# Altium PCB PCB1.PcbDoc
Units mm, origin at the board's own origin, x right, y up, seen from the top; angles counter-clockwise.
Board outline 140.46 x 110.24 mm, 2 copper layers (Top Layer, Bottom Layer); 74 components, 50 nets, 244 pads, 30 vias.
Unrouted connection lines stored in the file: 1.
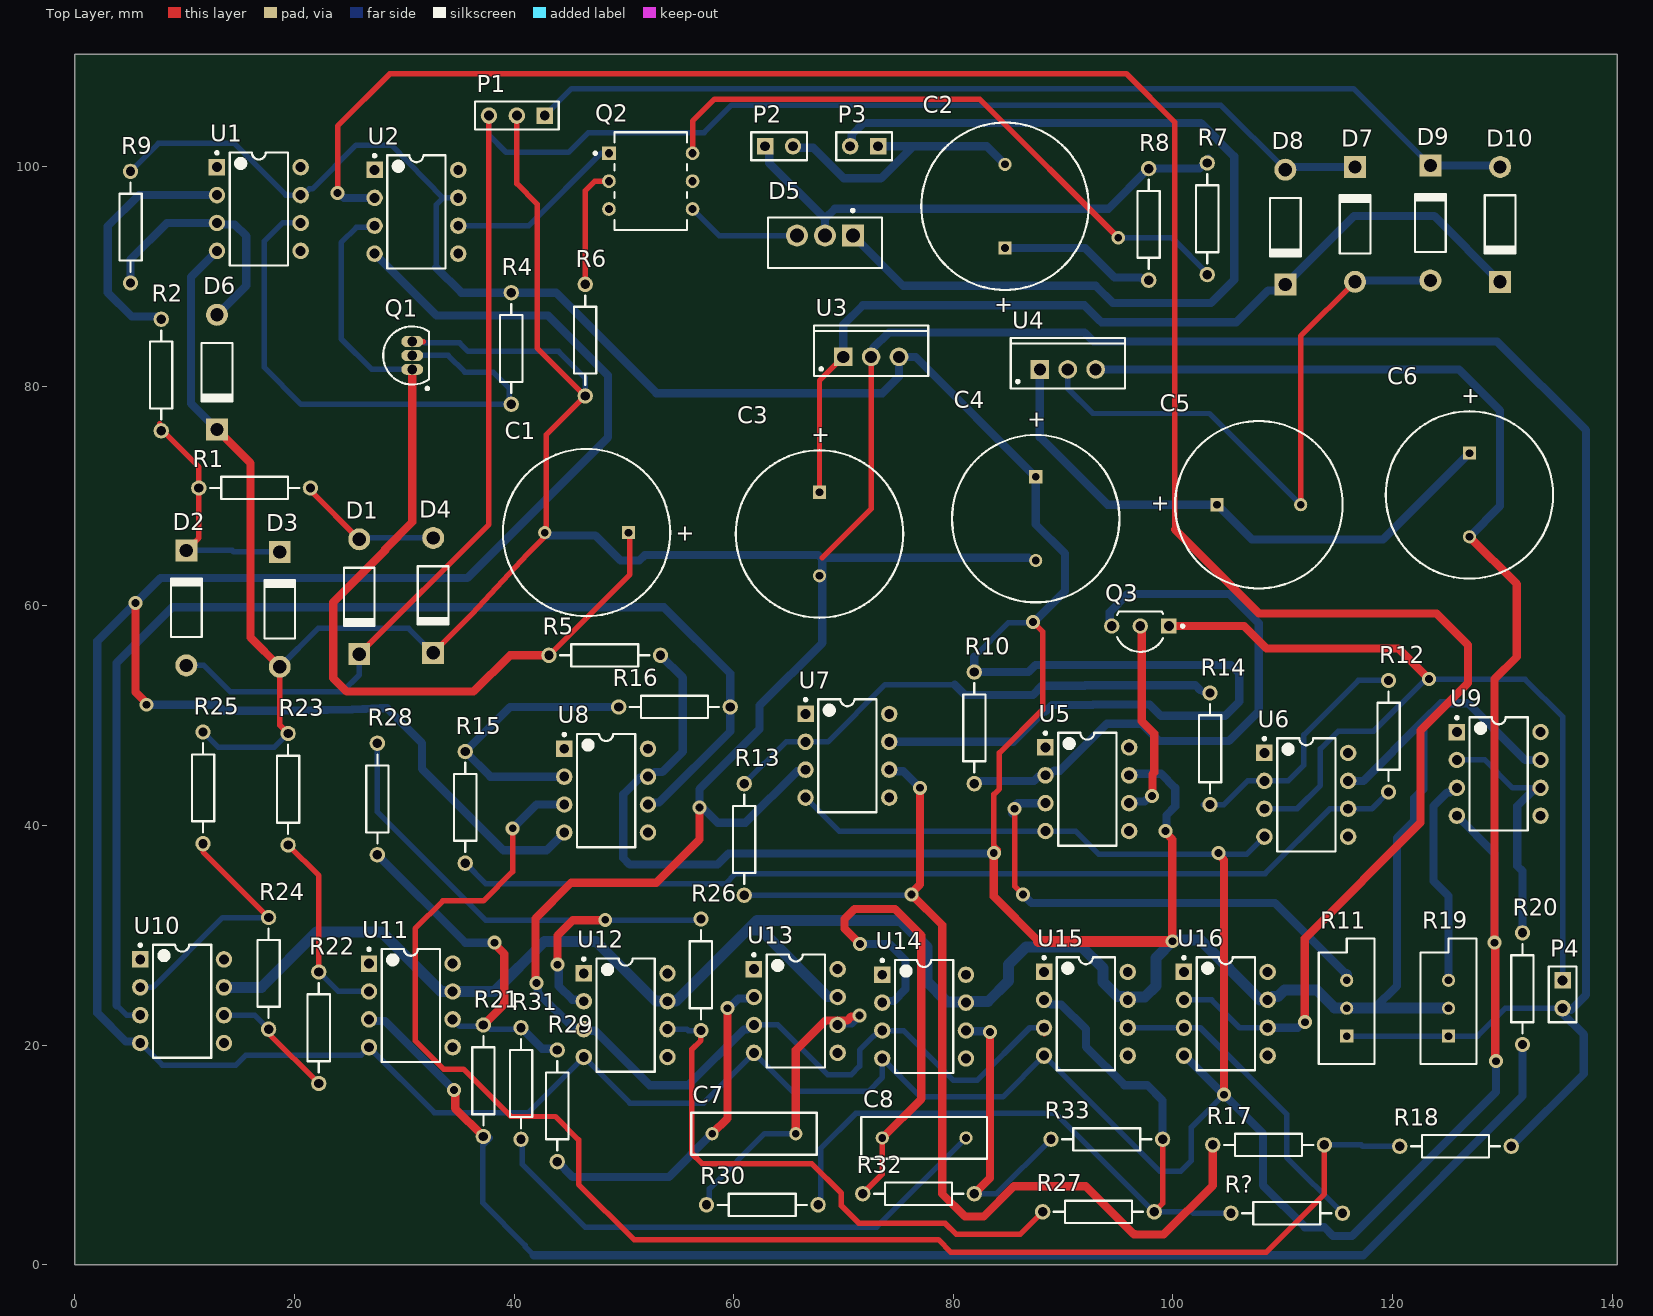
[diagram p0: Top Layer view]
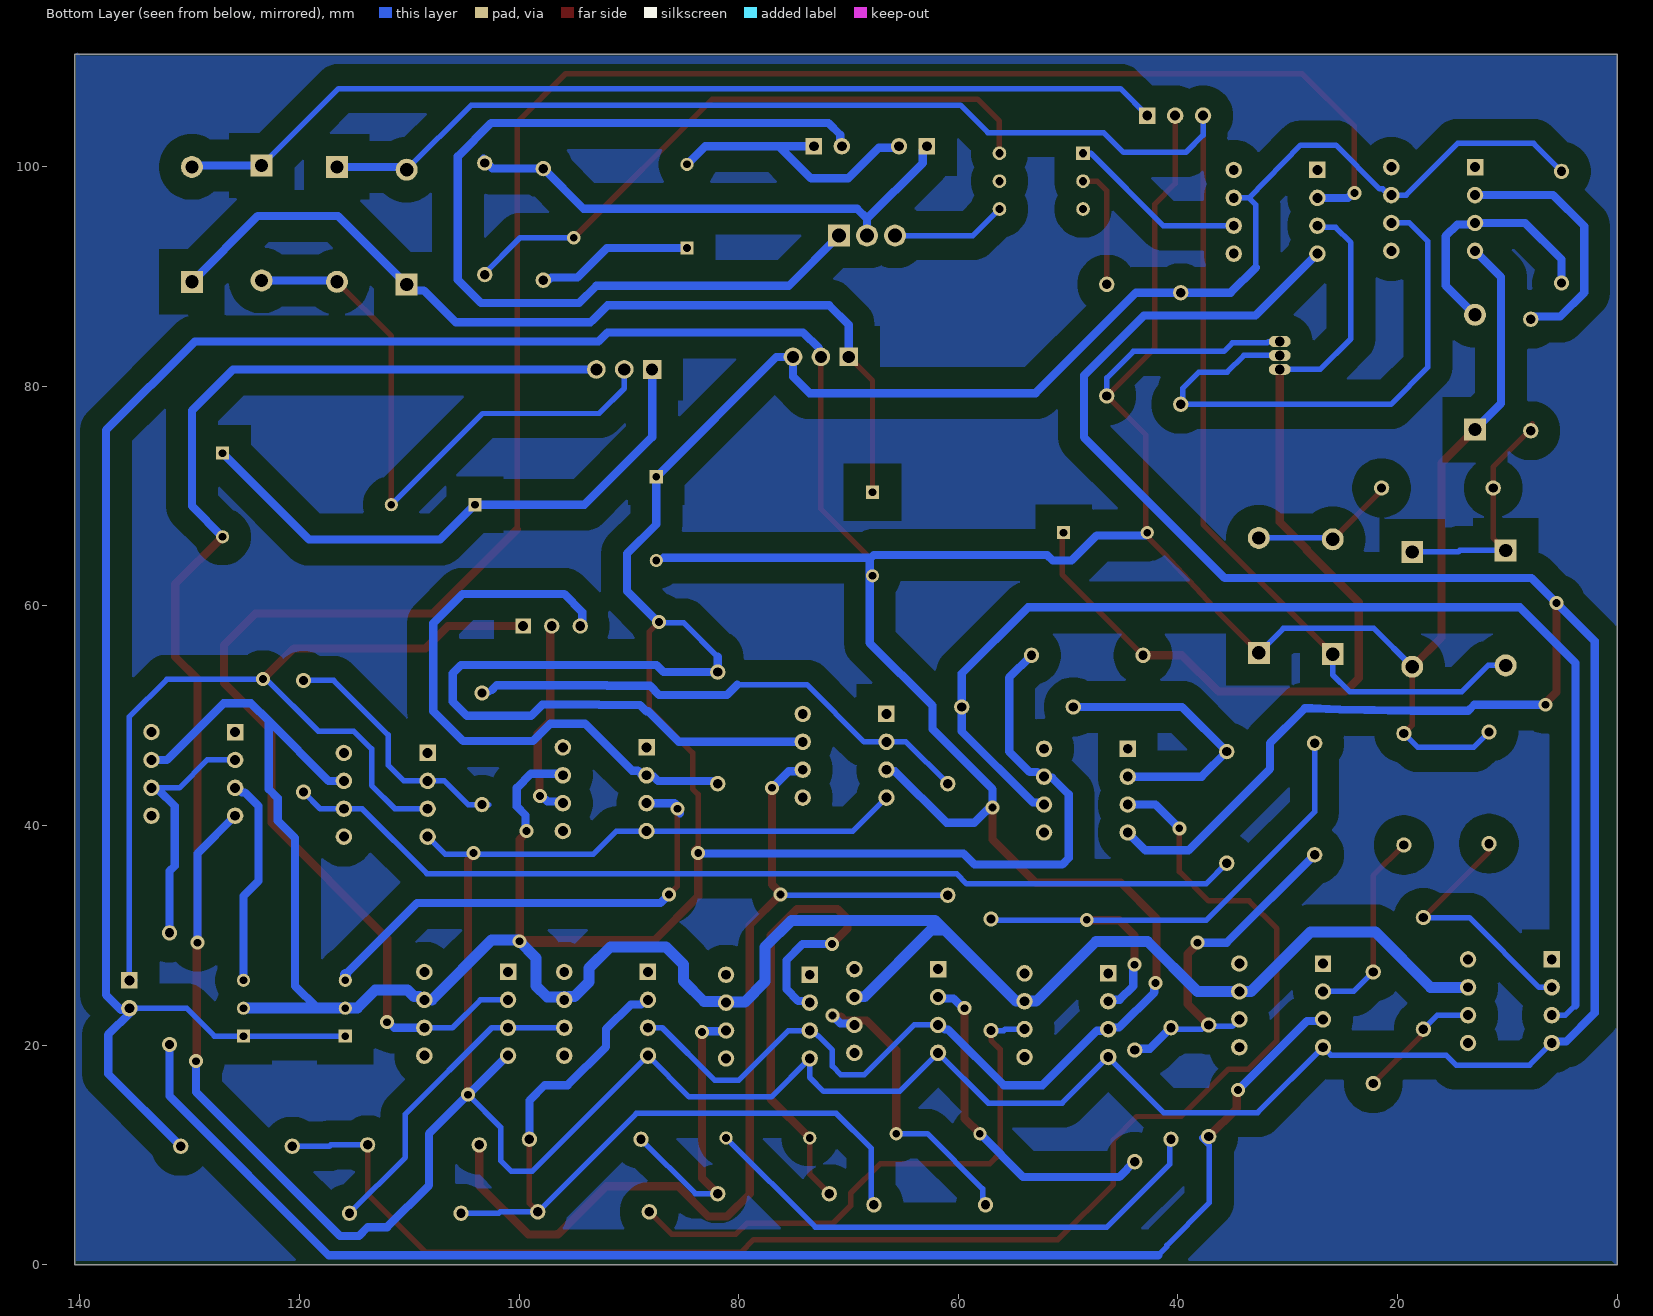
[diagram p1: Bottom Layer view, seen from below]

## Layer stack, top to bottom
Top Solder: solder mask 0.0102, Solder Resist, Dk 3.5
Top Layer: signal copper 0.0356
Dielectric 1: dielectric 0.32, FR-4, Dk 4.8
Bottom Layer: signal copper 0.0356
Bottom Solder: solder mask 0.0102, Solder Resist, Dk 3.5

## Board outline
0,0 140.462,0 140.462,110.236 0,110.236

## Design rules (kind name [scope] priority, off if disabled: settings)
Clearance [All] p1: gap=1 ignorepadtopadclearanceinfootprint=FALSE
PolygonConnect [All] p1: connectstyle=Relief reliefconductorwidth=0.254 reliefentries=4 polygonreliefangle="90 Angle" airgapwidth=0.254
RoutingVias [All] p1: holewidth=0.711 width=1.27 viastyle="Through Hole" minholewidth=0.711 minwidth=1.27 maxholewidth=0.711 maxwidth=1.27
SolderMaskExpansion [All] p1: expansion=0.102 istentingtop=FALSE
Width [All] p1: maxlimit=1 minlimit=0.3 preferedwidth=0.75
30 further rules are at their usual default settings.

## Components (designator, comment, footprint, x,y, rotation, side; value= is the part's Value field where it differs from the comment)
C1 "Cap Pol1" RB7.6-15 46.609,66.675 r0 top value=100pF
C2 "Cap Pol1" RB7.6-15 84.709,96.393 r270 top value=100pF
C3 "Cap Pol1" RB7.6-15 67.818,66.548 r90 top value=400uF
C4 "Cap Pol1" RB7.6-15 87.503,67.945 r90 top value=400uF
C5 "Cap Pol1" RB7.6-15 107.823,69.215 r180 top value=400uF
C6 "Cap Pol1" RB7.6-15 127,70.104 r90 top value=400uF
C7 "Cap" RAD-0.3 61.849,11.938 r0 top value=100pF
C8 "Cap" RAD-0.3 77.343,11.557 r180 top value=100pF
D1 "Diode 1N4004" DO-41 25.908,60.833 r270 top
D2 "Diode 1N4004" DO-41 10.16,59.817 r90 top
D3 "Diode 1N4004" DO-41 18.669,59.69 r90 top
D4 "Diode 1N4004" DO-41 32.639,60.96 r270 top
D5 "BTA41" FP-TO-220AB-MFG 68.316,93.079 r270 top
D6 "Diode 1N4004" DO-41 12.954,81.28 r270 top
D7 "Diode 1N4004" DO-41 116.586,94.742 r90 top
D8 "Diode 1N4004" DO-41 110.236,94.488 r270 top
D9 "Diode 1N4004" DO-41 123.444,94.869 r90 top
D10 "Diode 1N4004" DO-41 129.794,94.742 r270 top
P1 "Header 3" HDR1X3 42.799,104.648 r180 top
P2 "Header 2" HDR1X2 62.865,101.854 r0 top
P3 "Header 2" HDR1X2 73.152,101.854 r180 top
P4 "Header 2" HDR1X2 135.484,25.908 r270 top
Q1 "NPN" TO-226-AA 30.734,82.804 r0 top
Q2 "MOC3021" FP-646BX-MFG 52.451,98.679 r0 top
Q3 "BC327-40ZL1G" ONSC-TO-92-3-29-11_AM_BL 97.028,58.166 r180 top
R1 "Res2" AXIAL-0.4 16.383,70.739 r0 top value=1K
R2 "Res2" AXIAL-0.4 7.874,81.026 r90 top value=1K
R4 "Res2" AXIAL-0.4 39.751,83.439 r270 top value=1K
R5 "Res2" AXIAL-0.4 48.26,55.499 r180 top value=1K
R6 "Res2" AXIAL-0.4 46.482,84.201 r270 top value=1K
R7 "Res2" AXIAL-0.4 103.124,95.25 r90 top value=1K
R8 "Res2" AXIAL-0.4 97.79,94.742 r270 top value=1K
R9 "Res2" AXIAL-0.4 5.08,94.488 r270 top value=1K
R10 "Res2" AXIAL-0.4 81.915,48.895 r270 top value=1K
R11 "RPot" VR5 115.824,23.368 r90 top value=1K
R12 "Res2" AXIAL-0.4 119.634,48.133 r90 top value=1K
R13 "Res2" AXIAL-0.4 60.96,38.735 r270 top value=1K
R14 "Res2" AXIAL-0.4 103.378,46.99 r90 top value=1K
R15 "Res2" AXIAL-0.4 35.56,41.656 r90 top value=1K
R16 "Res2" AXIAL-0.4 54.61,50.8 r0 top value=1K
R17 "Res2" AXIAL-0.4 108.712,10.922 r180 top value=1K
R18 "Res2" AXIAL-0.4 125.73,10.795 r0 top value=1K
R19 "RPot" VR5 125.095,23.368 r90 top value=1K
R20 "Res2" AXIAL-0.4 131.826,25.146 r270 top value=1K
R21 "Res2" AXIAL-0.4 37.211,16.764 r90 top value=1K
R22 "Res2" AXIAL-0.4 22.225,21.59 r90 top value=1K
R23 "Res2" AXIAL-0.4 19.431,43.307 r90 top value=1K
R24 "Res2" AXIAL-0.4 17.653,26.543 r270 top value=1K
R25 "Res2" AXIAL-0.4 11.684,43.434 r270 top value=1K
R26 "Res2" AXIAL-0.4 57.023,26.416 r270 top value=1K
R27 "Res2" AXIAL-0.4 93.218,4.826 r0 top value=1K
R28 "Res2" AXIAL-0.4 27.559,42.418 r90 top value=1K
R29 "Res2" AXIAL-0.4 43.942,14.478 r270 top value=1K
R30 "Res2" AXIAL-0.4 62.611,5.461 r0 top value=1K
R31 "Res2" AXIAL-0.4 40.64,16.51 r270 top value=1K
R32 "Res2" AXIAL-0.4 76.835,6.477 r0 top value=1K
R33 "Res2" AXIAL-0.4 93.98,11.43 r0 top value=1K
R? "Res2" AXIAL-0.4 110.363,4.699 r0 top value=1K
U1 "LM741J" NAB0008A 16.764,96.139 r0 top
U2 "LM741J" NAB0008A 31.115,95.885 r0 top
U3 "L7812CV" TO220 72.517,82.677 r0 top
U4 "L7912CV" TO-220 90.424,81.534 r0 top
U5 "LM741J" NAB0008A 92.202,43.307 r0 top
U6 "LM741J" NAB0008A 112.141,42.799 r0 top
U7 "LM741J" NAB0008A 70.358,46.355 r0 top
U8 "LM741J" NAB0008A 48.387,43.18 r0 top
U9 "LM741J" NAB0008A 129.667,44.704 r0 top
U10 "LM741J" NAB0008A 9.779,24.003 r0 top
U11 "LM741J" NAB0008A 30.607,23.622 r0 top
U12 "LM741J" NAB0008A 50.165,22.733 r0 top
U13 "LM741J" NAB0008A 65.659,23.114 r0 top
U14 "LM741J" NAB0008A 77.343,22.606 r0 top
U15 "LM741J" NAB0008A 92.075,22.86 r0 top
U16 "LM741J" NAB0008A 104.816,22.86 r0 top

## Footprints (in the part's own frame and the unit in brackets; to place one, negate y for a bottom-side part, rotate by r counter-clockwise, add the part's x,y. Pads: shape width x height; smd on the part's side, far side on the other; paste and mask are expansions set on the pad)
AXIAL-0.4 [mm] "Axial Device, Thru-Hole; 2 Leads; 0.4 in Pin Spacing"
  round 1.4 hole 0.85: 1(-5.08,0) 2(5.08,0)
  silkscreen extent -4.06,-1.02 4.06,1.02
DO-41 [mm] "Diode, Axial; Body 5.2 x 2.7 mm (LxDia. max), Lead Dia. 0.86 mm (max)"
  round 2 hole 1.2: 1(-5.23,0)
  rect 2x2 hole 1.2: 2(5.23,0)
  silkscreen extent -2.65,-1.4 2.75,1.4
FP-646BX-MFG [mm]
  rect 1.25x1.25 hole 0.75 paste-1000 mask+0: 1(-3.81,2.54)
  round 1.25 hole 0.75 paste-1000 mask+0: 2(-3.81,0) 3(-3.81,-2.54) 4(3.81,-2.54) 5(3.81,0) 6(3.81,2.54)
  silkscreen extent -5.17,-4.44 3.3,4.44, body extent -4.53,-4.54 4.53,4.54, height 0.25
FP-TO-220AB-MFG [mm]
  rect 2x2 hole 1.3 paste-1000 mask+0: 1(-0.647,2.55)
  round 2 hole 1.3 paste-1000 mask+0: 2(-0.647,0) 3(-0.647,-2.55)
  silkscreen extent -3.05,-5.2 2.3,5.2, body extent -2.4,-5.3 2.4,5.3, height 0.25
HDR1X2 [mm] "Connector; Header; 2 Position"
  rect 1.5x1.5 hole 0.9: 1(0,0)
  round 1.5 hole 0.9: 2(2.54,0)
  silkscreen extent -1.27,-1.27 3.81,1.27
HDR1X3 [mm] "Connector; Header; 3 Position"
  rect 1.5x1.5 hole 0.9: 1(0,0)
  round 1.5 hole 0.9: 2(2.54,0) 3(5.08,0)
  silkscreen extent -1.27,-1.27 6.35,1.27
NAB0008A [mm] "DIP, 8-Leads, Body 9.78x6.73mm, Pitch 2.54mm, Row Spacing 7.62mm"
  rect 1.5x1.5 hole 0.9: 1(-3.81,3.81)
  round 1.5 hole 0.9: 2(-3.81,1.27) 3(-3.81,-1.27) 4(-3.81,-3.81) 5(3.81,-3.81) 6(3.81,-1.27) 7(3.81,1.27) 8(3.81,3.81)
  silkscreen extent -3.93,-5.15 2.65,5.23, body extent -3.6,-5.15 3.6,5.15, height 5.08
ONSC-TO-92-3-29-11_AM_BL [mm] "TO, 3-Leads, Body Dia 4.7mm, Pitch 2.6mm"
  rect 1.4x1.4 hole 0.9: 1(-2.6,0)
  round 1.4 hole 0.9: 2(0,0) 3(2.6,0)
  silkscreen extent -3.98,-1.34 2.13,2.35, body extent -2.84,-1.34 2.84,2.35, height 5.33
RAD-0.3 [mm] "Radial Cap, Thru-Hole; 2 Leads; 0.3 in Pin Spacing"
  round 1.2 hole 0.7: 1(-3.81,0) 2(3.81,0)
  silkscreen extent -5.71,-1.91 5.71,1.91
RB7.6-15 [mm] "Polarized Capacitor (Radial); 2 Leads"
  rect 1.2x1.2 hole 0.7: 1(3.81,0)
  round 1.2 hole 0.7: 2(-3.81,0)
  silkscreen extent -7.62,-7.62 7.62,7.62
TO220 [mm] "TO, Thru-Hole, Vertical, Heatsink Mounted; 3 In-Line Leads; Pitch 2.54 mm"
  rect 1.7x1.7 hole 1.1: 1(-2.54,0)
  round 1.7 hole 1.1: 2(0,0) 3(2.54,0)
  silkscreen extent -5.2,-1.75 5.2,2.85, body extent -5.25,-1.8 5.25,2.9, height 19.7
TO-220 [mm] "TO, Thru-Hole, Vertical, Heatsink Mounted; 3 In-Line Leads; Pitch 2.54 mm"
  rect 1.7x1.7 hole 1.1: 1(-2.54,0)
  round 1.7 hole 1.1: 2(0,0) 3(2.54,0)
  silkscreen extent -5.2,-1.75 5.2,2.85, body extent -5.25,-1.8 5.25,2.9, height 19.7
TO-226-AA [mm] "TO, Flat Index; 3 In-Line, Axial Leads; Body Dia. 4.8mm; Leads 0.55 x 0.51 mm (max)"
  oval 2x1 hole 0.9: 1(0,-1.27) 2(0,0) 3(0,1.27)
  silkscreen extent -2.65,-3.13 1.52,2.65, body extent -2.65,-2.66 1.52,2.66, height 5.33
VR5 [mm] "Thru-Hole; 3 Leads"
  rect 1.2x1.2 hole 0.7: 1(-2.54,0)
  round 1.2 hole 0.7: 2(0,0) 3(2.54,0)
  silkscreen extent -5.08,-2.54 6.35,2.54

## Part data
C1 C2 C3 C4 C5 C6: "Polarized Capacitor (Radial)", LatestRevisionDate=17-Jul-2002, LatestRevisionNote="Re-released for DXP Platform.", PackageDescription="Polarized Capacitor (Radial); 2 Leads", PackageReference=RB7.6-15, Published=8-Jun-2000, Publisher="Altium Limited"
C7 C8: "Capacitor", LatestRevisionDate=17-Jul-2002, LatestRevisionNote="Re-released for DXP Platform.", PackageDescription="Radial Cap, Thru-Hole; 2 Leads; 0.3 in Pin Spacing", PackageReference=RAD-0.3, Published=8-Jun-2000, Publisher="Altium Limited"
D1 D2 D3 D4 D6 D7 D8 D9 D10: "1 Amp General Purpose Rectifier", Code_JEDEC=DO-204-AL, ComponentLink1Description="Manufacturer Link", ComponentLink1URL=http://www.fairchildsemi.com/, ComponentLink2Description=Datasheet, ComponentLink2URL=http://www.fairchildsemi.com/ds/1N%2F1N4001.pdf, DatasheetVersion=1998, LatestRevisionDate=17-Jul-2002, LatestRevisionNote="Re-released for DXP Platform.", PackageDescription="Diode, Axial; Body 5.2 x 2.7 mm (LxDia. max), Lead Dia. 0.86 mm (max)", PackageReference=DO-41, PackageVersion=Aug-1999, Published=8-Jun-2000, Publisher="Altium Limited"
D5: library part CMP-12193-000008-1, "TRIAC ALTERNISTOR 600V TO220AB", Forward Voltage=1.55V, Gate Trigger Current=50mA, Gate Trigger Voltage=1.3V, Hold Current=75mA, Manufacturer=STMicroelectronics, Manufacturer Part Number=BTA24-600BWRG, Max Junction Temp=+125°C, Off State Voltage=600V, On State Current Rms=25A, Package=TO-220AB, Temperature="-40°C to +125°C", Temperature Range Low=-40°C, Automotive=No, Category=Diode, ComponentLink2Description=Datasheet, ComponentLink2URL=https://www.st.com/resource/en/datasheet/bta24.pdf, Device Class L1="Discrete Semiconductors", Device Class L2=Thyristors, Device Class L3=TRIACs, Digikey Description="TRIAC ALTERNISTOR 600V TO220AB", Height=19.65mm, Lead Free=Yes, Mouser Description="Triacs 25 Amp 600 Volt", Octopart=https://octopart.com/bta24-600bwrg-stmicroelectronics-360258, RoHS=TRUE, Standoff Height=3.75mm, Temperature Range High=+125°C
P1: "Header, 3-Pin", LatestRevisionDate=17-Jul-2002, LatestRevisionNote="Re-released for DXP Platform.", Publisher="Altium Limited"
P2 P3 P4: "Header, 2-Pin", LatestRevisionDate=17-Jul-2002, LatestRevisionNote="Re-released for DXP Platform.", Publisher="Altium Limited"
Q1: "NPN Bipolar Transistor", Code_JEDEC=TO-226-AA, LatestRevisionDate=17-Jul-2002, LatestRevisionNote="Re-released for DXP Platform.", PackageDescription="TO, Flat Index; 3 In-Line, Axial Leads; Body Dia. 4.8mm; Leads 0.55 x 0.51 mm (max)", PackageReference=TO-226-AA, Published=8-Jun-2000, Publisher="Altium Limited"
Q2: library part CMP-07144-000005-1, "OPTOISOLATOR 4.17KV TRIAC 6DIP", Forward Current=30mA, Forward Voltage=1.25V, Isolation Voltage=4170Vrms, Manufacturer="ON Semiconductor", Manufacturer Part Number=MOC3041M, Max Junction Temp=+100°C, Package=646BX, Power Dissipation=250mW, Reverse Voltage=6V, Temperature="-40°C to +85°C", Temperature Range High=+85°C, Temperature Range Low=-40°C, Automotive=No, Category=Trans, ComponentLink2Description=Datasheet, ComponentLink2URL=https://www.onsemi.com/pub/Collateral/MOC3043M-D.pdf, Device Class L1=Optoelectronics, Device Class L2=Optocouplers, Device Class L3=unset, Digikey Description="OPTOISOLATOR 4.17KV TRIAC 6DIP", Footprint Url=https://www.onsemi.com/pub/Collateral/646BX.PDF, Height=5.08mm, Lead Free=Yes, Mouser Description="Optocoupler Triac AC Output 1 Channel 400VDRM 6-Pin Plastic Dip White Bulk", Octopart=https://octopart.com/moc3041m-on+semiconductor-84330395, RoHS=TRUE, Standoff Height=0.38mm
Q3: library part CMP-1048-01589-1, "Amplifier Transistor, PNP Silicon, 3-Pin TO-92, Pb-Free, Ammo Box", Manufacturer="On Semiconductor", ComponentLink1Description="Manufacturer URL", ComponentLink1URL=http://www.onsemi.com/, ComponentLink2Description=Datasheet, ComponentLink2URL=http://www.onsemi.com/pub_link/Collateral/BC327-D.PDF, ComponentLink3Description="Package Specification", ComponentLink3URL=http://www.onsemi.com/pub_link/Collateral/MAC97-D.PDF, DatasheetVersion="Rev. 6", IC Continuous (A)=-0.8, Mounting Technology="Through Hole", PackageDescription="3-Pin Transistor Outline, Body 4.825 x 3.685 mm, Pitch 1.27 mm", PackageReference=TO-92-3-29-11_AM_BL, PackageVersion="Rev. AM", Packing="Ammo Box", PartNumber=BC327-40ZL1G, Polarity=PNP, RoHS=TRUE
R1 R2 R4 R5 R6 R7 R8 R9 R10 R12 R13 R14 R15 R16 R17 R18 R20 R21 R22 R23 R24 R25 R26 R27 R28 R29 R30 R31 R32 R33 R?: "Resistor", LatestRevisionDate=17-Jul-2002, LatestRevisionNote="Re-released for DXP Platform.", PackageDescription="Axial Device, Thru-Hole; 2 Leads; 0.4 in Pin Spacing", PackageReference=AXIAL-0.4, Published=8-Jun-2000, Publisher="Altium Limited"
R11 R19: "Potentiometer", LatestRevisionDate=17-Jul-2002, LatestRevisionNote="Re-released for DXP Platform.", PackageDescription="Variable Resistor, Thru-Hole; 3 Leads", PackageReference=VR5, Published=8-Jun-2000, Publisher="Altium Limited", Set Position=0.5, Sim Note="Enter the Resistance value and the set point into parameter fields."
U1 U2 U5 U6 U7 U8 U9 U10 U11 U12 U13 U14 U15 U16: library part CMP-0055-00160-3, "Operational Amplifier, 8-pin CerDIP", Manufacturer="Texas Instruments", Package Reference=NAB0008A, PackageTopMarking=NSUZXYTT*LM741J, PowerWise=N, ComponentLink1Description="Datasheet URL", ComponentLink1URL=http://www.ti.com/general/docs/lit/getliterature.tsp?genericPartNumber=LM741&fileType=pdf, CompType=Amplifiers, PackageDescription="Cerdip, .400 x .310in Body, 8 Lead, .300in Centers, .100in Pitch", PinCount=8, RoHS=N
U3: library part CMP-0244-00450-1, "Positive Voltage Regulator, 12V, 3-Pin TO-220", ComponentLink1Description="Manufacturer URL", ComponentLink1URL=http://www.st.com, ComponentLink2Description=Datasheet, ComponentLink2URL=http://www.st.com/internet/com/TECHNICAL_RESOURCES/TECHNICAL_LITERATURE/DATASHEET/CD00000444.pdf, ComponentLink3Description="Package Specification", ComponentLink3URL=http://www.st.com/internet/com/TECHNICAL_RESOURCES/TECHNICAL_LITERATURE/PACKAGE_INFORMATION/CD00004649.pdf, DatasheetVersion=16/11/2011, PackageDescription="TO, Thru-Hole, Vertical, Heatsink Mounted; 3 In-Line Leads; Pitch 2.54 mm", PackageReference=TO220, PackageVersion=ver3.0
U4: library part CMP-0244-00457-1, "Negative Voltage Regulator, -12V, 3-Pin TO-220", ComponentLink1Description="Manufacturer URL", ComponentLink1URL=http://www.st.com, ComponentLink2Description=Datasheet, ComponentLink2URL=http://www.st.com/internet/com/TECHNICAL_RESOURCES/TECHNICAL_LITERATURE/DATASHEET/CD00000450.pdf, DatasheetVersion=1/11/2011, PackageDescription="TO, Thru-Hole, Vertical, Heatsink Mounted; 3 In-Line Leads; Pitch 2.54 mm", PackageReference=TO-220, PackageVersion=2011

## Via types
v1: diameter 1.27, hole 0.711, Top Layer to Bottom Layer, 30 vias

## Nets (pads, with @x,y where several pads share a name; then routed paths per layer and width w, separated by ;. In a path a pad name is that pad's centre, name@x,y a point inside that pad or via, vN(x,y) a via of type N, cw(c..) or ccw(c..) an arc to the next point about the centre after c; other vN are vias at no path point)
+12: C4.1 R4.1 R5.1 R9.1 R10.1 R11.2 R19.2 U1.7 U2.7 U3.3 U5.7 U6.7 U7.7 U8.7 U9.7 U10.7 U11.7 U12.7 U13.7 U14.7 U15.7 U16.7 | length 519
  Top Layer w0.5: U7.7 U7.7@74.439,47.625 ; U14.7 U14.7@81.153,24.13 ; v1(83.693,37.501) v1@84.032,37.84 ; v1@84.078,37.501 84.078,37.794 v1@84.032,37.84 ; v1(87.249,58.547) 88.138,57.658 88.138,50.546 84.201,46.609 84.201,43.343 83.693,42.835 83.693,38.179 v1@84.032,37.84
  Top Layer w0.75: v1(83.693,37.501) 83.693,33.53 87.759,29.464 ; v1(99.314,39.497) 99.314,39.356 99.949,38.721 v1(99.949,29.464)
  Top Layer w1: 87.759,29.464 v1(99.949,29.464)
  Bottom Layer w0.5: R9.1 7.62,102.108 14.529,102.108 19.228,97.409 U1.7 20.805,97.409 21.367,97.97 21.643,97.97 25.629,101.956 28.829,101.956 33.553,97.155 ; 32.918,90.805 32.918,96.52 33.553,97.155 ; U2.7 33.553,97.155 ; U13.7@69.442,24.411 U13.7 ; U14.7@81.091,23.938 U14.7 ; 81.915,55.372 84.992,58.449 v1@87.278,58.449 ; U16.7@107.95,24.13 U16.7
  Bottom Layer w0.75: 32.918,90.805 35.204,88.519 R4.1 43.815,88.519 52.959,79.375 73.558,79.375 75.057,80.874 U3.3 76.581,82.677 C4.1 87.503,67.437 90.17,64.77 90.17,61.341 v1@87.278,58.449 ; U8.7 52.101,44.354 51.459,44.354 49.947,42.842 49.947,37.035 50.533,36.449 58.521,36.449 59.537,37.465 83.657,37.465 v1(83.693,37.501) ; U8.7@52.543,44.594 52.815,44.865 53.501,44.865 55.372,46.736 55.372,53.467 R5.1 ; U7.7 85.455,47.625 88.23,50.4 88.404,50.4 88.987,50.983 92.704,50.983 92.747,51.026 97.88,51.026 98.911,49.995 104.734,49.995 106.045,51.306 106.045,53.848 105.283,54.61 87.491,54.61 86.856,53.975 R10.1 81.915,55.372 ; U5.7 96.156,44.721 98.916,44.721 100.203,43.434 100.203,41.728 99.413,40.939 99.413,39.596 v1(99.314,39.497) ; U6.7 117.348,44.069 122.79,49.511 ; 118.364,23.368 120.396,25.4 120.396,38.862 121.982,40.448 121.982,42.499 122.79,43.307 122.79,49.511 ; U9.7 132.08,45.974 126.924,51.13 124.409,51.13 122.79,49.511
  Bottom Layer w1: U10.7 16.993,25.273 22.022,30.302 27.94,30.302 33.35,24.892 U11.7 38.227,24.892 42.799,29.464 47.447,29.464 52.908,24.003 U12.7 54.762,24.003 61.239,30.48 ; U13.7@69.442,24.411 68.553,24.411 62.484,30.48 61.239,30.48 ; U14.7@81.091,23.938 79.44,23.938 77.591,25.787 77.591,28.962 75.184,31.369 62.128,31.369 61.239,30.48 ; U14.7 81.236,23.959 83.141,23.959 85.017,25.835 85.017,27.359 86.614,28.956 91.694,28.956 93.635,27.015 93.635,25.738 94.953,24.42 95.46,24.42 95.654,24.226 95.714,24.226 U15.7@95.849,24.361 ; U15.7@95.849,24.42 95.885,24.384 97.434,24.384 98.45,25.4 98.45,27.94 100.076,29.566 102.514,29.566 U16.7@107.95,24.13 ; U16.7 108.761,24.13 109.051,24.42 109.558,24.42 110.157,25.019 113.096,25.019 114.709,23.406 115.786,23.406 R11.2 118.364,23.368 R19.2
-12: C6.2 U2.4 U4.3 U5.4 U6.4 U7.4 U8.4 U9.4 U10.4 U11.4 U12.4 U13.4 U14.4 U15.4 U16.4 | length 531.7
  Top Layer w0.5: U8.4@44.577,39.212 U8.4
  Top Layer w0.75: v1(5.532,60.269) 5.532,52.141 6.533,51.14 v1(6.533,50.999) ; v1(104.14,37.501) 104.14,37.36 104.648,36.852 v1(104.648,15.494) ; C6.2 131.318,61.976 131.318,55.372 129.286,53.34 v1(129.286,29.337) 129.35,29.273 129.35,18.605 v1(129.413,18.542)
  Bottom Layer w0.5: U10.4 7.976,18.186 14.681,18.186 15.596,19.101 26.086,19.101 U11.4 32.74,13.869 41.301,13.869 U12.4 50.546,14.732 57.277,14.732 U13.4 65.349,15.804 72.263,15.804 73.533,17.074 U14.4 77.033,15.296 84.511,15.296 U15.4 98.806,8.509 100.711,8.509 101.682,9.48 101.682,12.528 v1(104.648,15.494) ; U7.4 69.596,39.497 U5.4 91.135,39.497 93.243,37.389 104.028,37.389 v1(104.14,37.501) ; v1@104.14,37.389 106.731,37.389 U6.4
  Bottom Layer w0.75: U10.4 5.825,20.337 4.646,20.337 2.06,22.923 2.06,56.797 v1(5.532,60.269) 7.808,62.545 35.748,62.545 48.557,75.354 48.557,80.996 43.109,86.444 32.936,86.444 U2.4 ; v1@6.534,50.999 13.024,50.999 13.579,50.444 18.588,50.444 18.744,50.462 25.28,50.572 27.835,50.673 28.448,50.673 28.668,50.453 31.623,47.498 31.623,45.163 39.045,37.741 42.948,37.741 U8.4 ; U4.3 126.06,81.534 129.794,77.8 129.794,69.088 C6.2 ; U16.4 101.049,19.05 104.605,15.494 v1(104.648,15.494) 108.204,11.938 108.204,7.239 112.014,3.429 113.779,3.429 114.584,2.624 116.302,2.624 129.413,15.735 v1(129.413,18.542) ; U9.4 129.286,37.465 v1(129.286,29.337)
GND: C1.2 C3.2 C4.2 D3.1 D4.2 D6.2 P1.2 P4.2 Q1.3 R6.2 R11.1 R18.2 R19.1 R23.2 R25.1 U1.4 U3.2 U7.3 U12.3 U13.3 U14.3 U15.3 | length 506
  Top Layer w0.5: D3.1 18.669,49.149 R23.2 ; Q1.3 30.754,84.054 31.752,84.054 ; D4.2 36.181,59.272 41.224,64.719 42.926,66.421 42.926,75.565 R6.2 42.113,83.49 42.113,96.596 40.259,98.45 P1.2 ; U7.3 U7.3@66.739,44.894 ; 68.072,64.389 72.517,68.834 U3.2 ; U15.3@88.265,21.05 U15.3
  Top Layer w0.75: D6.2 16.004,73 16.004,57.125 D3.1 ; v1(42.06,25.654) 41.96,25.753 41.96,31.546 45.212,34.798 52.959,34.798 56.896,38.735 v1(56.896,41.656)
  Bottom Layer w0.5: R25.1 13.081,47.117 18.161,47.117 R23.2 ; D3.1 22.172,57.963 30.406,57.963 D4.2 ; Q1.3 30.754,84.054 31.752,84.054 31.859,83.947 35.052,83.947 35.814,83.185 44.07,83.185 46.482,80.773 R6.2 ; U13.3 64.033,21.844 68.573,17.304 70.688,17.304 71.469,18.085 71.469,19.56 72.705,20.796 72.722,20.796 73.262,21.336 75.47,21.336 80.01,16.796 82.169,16.796 86.963,21.59 U15.3 ; 86.86,64.389 86.98,64.269 87.369,64.269 C4.2 ; R11.1 R19.1 127.737,20.828 130.277,23.368 P4.2@135.001,23.368
  Bottom Layer w0.75: D6.2 10.579,78.425 10.579,89.954 U1.4 ; v1(42.06,25.654) 42.159,25.555 42.159,24.819 45.372,21.607 46.211,21.607 46.499,21.319 47.388,21.319 52.35,16.357 55.867,16.357 60.939,21.429 61.231,21.429 61.646,21.844 U13.3 ; C1.2@42.926,66.421 47.401,66.421 49.687,64.135 51.405,64.135 51.913,64.643 67.696,64.643 67.95,64.389 68.072,64.389 ; U7.3 66.404,44.941 65.769,44.941 61.087,40.259 58.547,40.259 57.41,41.396 57.297,41.396 57.037,41.656 v1(56.896,41.656) 56.896,43.31 62.357,48.771 62.357,50.927 68.072,56.642 68.072,62.357 68.072,62.738 68.072,64.389 ; U3.2 72.699,82.859 72.699,83.465 74.135,84.902 91.947,84.902 92.762,84.087 129.527,84.087 137.609,76.005 137.609,24.588 136.247,23.226 135.625,23.226 P4.2 ; 86.86,64.389 68.072,64.389 ; R18.2 130.937,10.668 130.937,10.922 137.414,17.399 137.414,20.955 135.384,22.985 135.242,23.127 P4.2@135.001,23.368
NetC1_1: C1.1 Q1.1 R5.2 U2.3 | length 86.7
  Top Layer w0.5: R5.2 50.546,62.865 C1.1@50.546,66.421
  Top Layer w0.75: Q1.1 30.734,67.644 28.283,65.193 28.283,65.079 23.533,60.329 23.533,53.429 24.765,52.197 36.322,52.197 39.624,55.499 R5.2
  Bottom Layer w0.5: U2.3 27.163,94.473 25.639,94.473 24.257,93.091 24.257,84.328 27.051,81.534 Q1.1
NetC2_1: C2.1 R8.2 | length 14.3
  Bottom Layer w0.75: C2.1 92.01,92.583 94.677,89.916 97.076,89.916 97.206,89.786 97.666,89.786 R8.2
NetC2_2: C2.2 P2.2 P3.1 | length 25.6
  Bottom Layer w0.75: P2.2 65.549,101.71 67.251,101.71 70.029,98.933 73.406,98.933 76.327,101.854 ; P3.1 76.327,101.854 ; C2.2 83.058,101.854 76.327,101.854
NetC3_1: C3.1 D8.2 D10.2 U3.1 | length 83.8
  Top Layer w0.5: C3.1 67.818,80.518 U3.1
  Bottom Layer w0.75: U3.1 69.977,85.598 71.755,87.376 91.948,87.376 93.362,85.962 93.487,85.837 105.776,85.837 108.671,88.732 109.71,88.732 116.482,95.504 123.802,95.504 D10.2
NetC5_1: C5.1 C6.1 U4.1 | length 52.4
  Bottom Layer w0.75: U4.1 87.884,75.362 94.031,69.215 C5.1 107.188,66.04 119.126,66.04 C6.1
NetC5_2: C5.2 D7.1 D9.1 U4.2 | length 56.8
  Top Layer w0.5: C5.2 111.633,84.559 D7.1
  Bottom Layer w0.5: U4.2 90.424,79.807 92.71,77.521 103.327,77.521 C5.2 ; 119.939,89.512 120.066,89.639
  Bottom Layer w0.75: D7.1 116.713,89.639 120.066,89.639 D9.1
NetC7_1: C7.1 R29.2 U13.2 | length 31.4
  Top Layer w0.5: U13.2@61.658,24.193 U13.2
  Top Layer w0.75: C7.1 59.436,13.335 v1(59.436,23.368)
  Bottom Layer w0.75: R29.2 45.339,8.001 54.102,8.001 C7.1 ; v1(59.436,23.368) 59.577,23.368 60.449,24.24 61.705,24.24 U13.2
NetC7_2: C7.2 R30.1 U13.6 | length 28.8
  Top Layer w0.75: C7.2 65.659,19.558 68.36,22.259 70.349,22.259 70.701,22.611 71.353,22.611 v1(71.452,22.71) ; U13.6 U13.6@69.677,22.052
  Bottom Layer w0.5: R30.1@57.785,5.461 57.785,6.909 62.814,11.938 C7.2
  Bottom Layer w0.75: U13.6 69.613,21.988 70.753,21.988 71.452,22.687 v1(71.452,22.71)
NetC8_1: C8.1 R31.2 | length 48.3
  Bottom Layer w0.5: R31.2@40.767,11.368 40.767,9.144 46.482,3.429 73.025,3.429 C8.1
NetC8_2: C8.2 R32.1 U14.2 | length 47
  Top Layer w0.5: R32.1 73.533,8.255 C8.2
  Top Layer w0.75: v1(71.501,29.21) 70.104,30.607 70.104,31.496 71.007,32.399 74.69,32.399 77.089,30 77.089,15.113 C8.2
  Bottom Layer w0.75: v1(71.501,29.21) 74.184,29.21 75.658,27.736 75.658,25.096 74.581,24.02 73.677,24.02 U14.2
NetD1_1: D1.1 D4.1 R1.2 | length 13.3
  Top Layer w0.5: R1.2 21.463,70.508 D1.1
  Bottom Layer w0.5: D1.1 26.035,66.19 D4.1
NetD1_2: D1.2 D2.1 D7.2 D8.1 P1.3 | length 158.8
  Top Layer w0.5: D1.2 37.719,67.414 P1.3
  Bottom Layer w0.5: D2.1 11.77,54.587 14.16,52.197 24.384,52.197 25.908,53.721 D1.2 ; P1.3 37.719,102.87 39.294,101.295 44.963,101.295 46.766,103.099 57.302,103.099 59.808,105.604 104.35,105.604 D8.1
  Bottom Layer w0.75: D8.1 110.475,99.957 111.286,99.957 111.3,99.972 113.538,99.972 D7.2
NetD2_2: D2.2 D3.2 R1.1 R2.1 | length 22
  Top Layer w0.5: R2.1@7.747,76.581 7.747,76.337 8.082,76.003 8.082,75.865 11.303,72.644 R1.1 11.303,66.19 D2.2
  Bottom Layer w0.5: D2.2 14.351,65.047 14.478,64.92 D3.2
NetD5_1: D5.1 P3.2 | length 87
  Bottom Layer w0.75: P3.2 70.756,101.998 70.756,102.902 71.832,103.979 102.536,103.979 105.58,100.935 105.58,89.692 103.475,87.587 94.531,87.587 92.964,89.154 75.438,89.154 D5.1
NetD5_2: D5.2 P2.1 R7.2 R8.1 | length 47.9
  Bottom Layer w0.75: P2.1 63.24,101.479 63.24,100.341 68.316,95.265 ; D5.2 68.316,95.265 ; R7.2 102.948,100.33 102.44,99.822 R8.1 94.132,96.164 69.215,96.164 68.316,95.265 ; R7.2@103.134,100.34 103.251,100.222 R7.2@103.251,100.711
NetD5_3: D5.3 Q2.4 | length 10.5
  Bottom Layer w0.5: Q2.4 58.674,93.726 D5.3
NetD6_1: D6.1 R9.2 U1.3 | length 22.8
  Bottom Layer w0.75: R9.2 5.08,91.567 8.382,94.869 U1.3 13.098,94.725 14.563,94.725 15.621,93.668 15.621,89.177 D6.1
NetD9_2: D9.2 D10.1 P1.1 | length 91
  Bottom Layer w0.5: P1.1 45.255,107.104 116.439,107.104 D9.2 ; D10.1@129.667,100.099 D10.1
  Bottom Layer w0.75: D9.2 D10.1@129.667,100.099
NetP4_1: P4.1 Q3.1 U6.3 | length 85.6
  Top Layer w0.75: Q3.1 106.491,58.166 108.523,56.134 120.523,56.134 v1(123.317,53.34)
  Bottom Layer w0.5: U6.3 111.303,41.529 113.436,43.663 113.436,46.99 115.055,48.609 118.288,48.609 122.993,53.315 132.08,53.315 135.484,49.911 P4.1 P4.1@135.001,25.908
NetQ1_2: Q1.2 R4.2 U1.6 | length 51
  Bottom Layer w0.5: U1.6 18.923,94.869 17.246,93.192 17.246,81.738 20.625,78.359 R4.2 39.579,78.531 39.579,79.801 38.1,81.28 35.534,81.28 34.01,82.804 Q1.2
NetQ2_1: Q2.1 U2.6 | length 16.5
  Bottom Layer w0.5: U2.6 41.326,94.615 47.93,101.219 Q2.1
NetQ2_2: Q2.2 R6.1 | length 11
  Top Layer w0.5: R6.1 46.482,97.79 47.371,98.679 Q2.2
NetQ2_6: Q2.6 R7.1 | length 57.4
  Top Layer w0.5: Q2.6 56.261,104.14 58.268,106.147 82.398,106.147 v1(95.021,93.523)
  Bottom Layer w0.5: v1(95.021,93.523) 99.898,93.523 R7.1@103.314,90.106
NetQ3_2: Q3.2 U5.6 | length 18.4
  Top Layer w0.75: Q3.2@97.152,58.155 97.152,57.582 97.155,57.579 97.155,49.53 98.298,48.387 98.298,44.839 98.137,44.678 98.137,42.751 v1(98.09,42.704)
  Bottom Layer w0.75: U5.6 96.156,42.181 97.426,42.181 97.95,42.704 v1(98.09,42.704)
NetQ3_3: Q3.3 R10.2 U5.2 | length 54.3
  Bottom Layer w0.5: R10.2 82.159,43.815 82.413,44.069 R10.2@82.423,44.069 ; 94.121,58.909 Q3.3@94.256,58.774
  Bottom Layer w0.75: R10.2@82.423,44.069 87.354,44.069 87.718,44.433 88.248,44.433 U5.2 ; U5.2@88.773,44.577 89.188,44.992 89.712,44.992 93.996,49.276 97.155,49.276 98.742,47.688 105.093,47.688 107.823,50.419 107.823,58.42 105.156,61.087 95.885,61.087 94.256,59.458 94.256,58.774 Q3.3@94.256,58.315
NetR2_2: R2.2 U1.2 | length 22.7
  Bottom Layer w0.75: R2.2@7.62,86.36 5.194,86.36 3.005,88.549 3.005,94.572 5.842,97.409 U1.2
NetR11_3: R11.3 U5.3 | length 44.6
  Top Layer w0.5: v1@85.578,41.495 85.578,34.488 v1(86.335,33.731)
  Bottom Layer w0.5: R11.3@115.764,25.968 R11.3
  Bottom Layer w0.75: v1@85.344,41.122 v1@85.344,41.154 ; v1@85.344,41.529 85.852,42.037 U5.3 ; v1@85.578,41.388 v1(85.578,41.529) ; v1(86.335,33.731) 87.123,32.942 109.298,32.942 R11.3@115.786,26.454
  Bottom Layer w1: R11.3@115.786,26.454 115.786,26 115.818,25.968 R11.3@115.884,25.968
NetR12_1: R12.1 R15.1 U6.6 | length 88.3
  Bottom Layer w0.5: R15.1 37.437,34.699 59.246,34.699 60.163,35.616 108.387,35.616 114.3,41.529 U6.6 118.11,41.529 R12.1
NetR12_2: R12.2 R14.1 U6.2 | length 23.2
  Bottom Layer w0.5: R14.1@102.743,41.91 R14.1 104.648,41.91 106.807,44.069 U6.2 110.49,44.069 111.928,45.507 111.928,48.26 116.881,53.213 R12.2
NetR13_1: R13.1 R14.2 U7.2 | length 46.6
  Bottom Layer w0.5: R13.1 64.77,47.625 U7.2 68.58,47.625 73.787,52.832 80.124,52.832 ; 102.46,52.353 102.585,52.228 R14.2@102.743,52.07
  Bottom Layer w0.75: 80.124,52.832 81.056,51.9 87.256,51.9 88.089,52.733 91.979,52.733 92.022,52.776 102.037,52.776 102.46,52.353
NetR13_2: R13.2 R17.2 U7.6 | length 91.6
  Top Layer w0.5: 96.296,2.923 96.586,2.923 96.652,2.857
  Top Layer w0.75: v1(76.962,43.434) 76.962,34.634 76.2,33.872 v1(76.2,33.731) 78.994,30.937 78.994,6.464 81.056,4.402 82.774,4.402 85.535,7.163 92.055,7.163 96.45,2.768 97.422,2.768 97.439,2.751 99.157,2.751 103.632,7.226 R17.2
  Bottom Layer w0.5: R13.2 76.124,33.655 v1(76.2,33.731)
  Bottom Layer w0.75: U7.6 74.312,44.941 75.455,44.941 v1(76.962,43.434)
NetR15_2: R15.2 R16.1 U8.2 | length 25.6
  Bottom Layer w0.75: U8.2 37.846,44.45 R15.2 39.624,50.8 R16.1
NetR16_2: R16.2 U8.6 U10.3 | length 109.7
  Bottom Layer w0.5: 3.81,23.647 4.724,22.733 U10.3 ; U8.6 52.388,42.101 U8.6@52.896,42.101
  Bottom Layer w0.75: 3.81,23.647 3.81,54.813 8.865,59.868 53.67,59.868 59.69,53.848 R16.2 59.69,48.895 59.69,48.579 53.212,42.101 U8.6@52.896,42.101
NetR17_1: R17.1 R18.1 U8.3 | length 137.5
  Top Layer w0.5: v1(39.878,39.751) 39.878,35.814 37.211,33.147 33.528,33.147 30.988,30.607 30.988,20.413 33.589,17.812 35.401,17.812 39.706,13.507 43.77,13.507 45.892,11.385 45.892,7.321 50.927,2.286 78.643,2.286 79.786,1.143 96.748,1.143 96.765,1.126 99.831,1.126 99.848,1.143 108.483,1.143 113.792,6.452 R17.1
  Bottom Layer w0.5: R17.1 117.145,10.922 117.272,10.795 R18.1
  Bottom Layer w0.75: v1(39.878,39.751) 42.037,41.91 U8.3
NetR19_3: R19.3 U9.3 | length 19.2
  Bottom Layer w0.75: R19.3 125.095,33.589 123.732,34.952 123.732,41.774 124.54,42.582 124.977,43.019 125.239,43.019 125.654,43.434 U9.3
NetR20_1: R20.1 U9.2 U9.6 | length 23.8
  Top Layer w0.5: U9.6@132.997,43.243 133.286,43.243 U9.6
  Bottom Layer w0.5: U9.2 128.397,45.974 130.937,43.434 U9.6
  Bottom Layer w0.75: R20.1 131.826,35.851 131.352,36.325 131.352,41.774 132.868,43.29 133.333,43.29 U9.6
NetR20_2: R20.2 R21.1 U11.3 | length 129.4
  Top Layer w0.75: v1(34.544,15.927) 34.643,15.828 34.643,14.252 R21.1
  Bottom Layer w0.5: R21.1@37.846,11.557 37.16,10.871 37.16,5.639 41.021,1.778 41.021,1.651 41.783,0.889
  Bottom Layer w0.75: U11.3 26.941,22.208 28.263,22.208 v1(34.544,15.927) ; 41.783,0.889 41.798,0.874 117.333,0.874 131.826,15.367 R20.2
NetR21_2: R21.2 R28.1 R29.1 R31.1 U11.6 | length 33.5
  Top Layer w0.75: R21.2 39.116,23.749 39.116,28.307 38.227,29.196 v1(38.227,29.337)
  Bottom Layer w0.5: U11.6 35.052,21.717 R21.2@37.211,21.717 ; R21.2 37.455,21.844 37.836,21.463 R31.1@40.767,21.463
  Bottom Layer w0.75: R28.1 35.56,29.337 v1(38.227,29.337) ; R31.1 40.767,21.463 42.548,19.682 43.818,19.682 R29.1
NetR22_1: R22.1 R24.2 U10.6 | length 11.4
  Top Layer w0.5: R24.2 17.653,21.082 R22.1
  Bottom Layer w0.5: U10.6 16.383,22.733 R24.2
NetR22_2: R22.2 R23.1 U11.2 | length 18
  Top Layer w0.5: R23.1 22.225,35.433 R22.2
  Bottom Layer w0.5: R22.2 24.003,24.892 U11.2
NetR24_1: R24.1 R25.2 U10.2 | length 23.5
  Top Layer w0.5: R25.2 11.684,37.592 R24.1
  Bottom Layer w0.5: U10.2 7.112,25.273 13.462,31.623 R24.1
NetR26_1: R26.1 R28.2 U12.2 | length 52.4
  Top Layer w0.75: v1(43.97,27.329) 43.97,30 45.339,31.369 48.258,31.369 v1(48.307,31.418)
  Bottom Layer w0.5: R28.2 27.559,41.25 37.44,31.369 48.258,31.369 v1(48.307,31.418) ; v1@48.285,31.369 R26.1@57.15,31.369
  Bottom Layer w0.75: v1(43.97,27.329) 44.07,27.23 44.07,25.384 45.307,24.147 46.211,24.147 U12.2
NetR26_2: R26.2 R27.1 U12.6 | length 51.2
  Top Layer w0.5: R26.2 57.023,20.447 56.185,19.609 56.185,10.16 57.125,9.22 67.107,9.22 69.799,6.528 69.799,5.385 71.398,3.786 79.265,3.786 80.274,2.777 86.089,2.777 R27.1
  Bottom Layer w0.5: U12.6 55.753,21.463 55.88,21.336 R26.2
NetR27_2: R27.2 R30.2 R33.2 R?.1 U15.2 | length 73.6
  Top Layer w0.5: R27.2 99.06,5.588 R33.2
  Bottom Layer w0.5: R30.2@67.945,5.461 67.945,10.621 71.12,13.796 89.328,13.796 R27.2 101.727,4.826 101.854,4.699 R?.1
  Bottom Layer w0.75: U15.2 88.468,24.13 88.883,23.715 89.823,23.715 92.075,21.463 92.075,19.855 95.573,16.357 97.663,16.357 99.06,14.96 R33.2
NetR32_2: R32.2 R33.1 U14.6 | length 26.6
  Top Layer w0.75: R32.2 83.332,7.894 v1(83.332,21.209)
  Bottom Layer w0.5: R32.2 83.947,6.477 R33.1
  Bottom Layer w0.75: U14.6 81.216,21.273 83.268,21.273 v1(83.332,21.209)
NetR?_2: R?.2 U15.6 U16.3 | length 28.9
  Bottom Layer w0.5: U15.6 U16.3 102.489,21.59 110.363,13.716 110.363,9.779 R?.2
NetU2_2: U2.2 U16.2 U16.6 | length 210.9
  Top Layer w0.5: v1(23.939,97.6) 23.939,103.695 28.702,108.458 95.758,108.458 100.178,104.038 100.178,66.954 ; U16.6@108.434,21.399 U16.6
  Top Layer w0.75: 100.178,66.954 107.823,59.309 124.014,59.309 126.873,56.45 126.873,52.975 122.555,48.657 122.555,40.259 112.014,29.718 v1(112.014,22.098)
  Bottom Layer w0.5: U16.2 103.53,24.13 106.07,21.59 U16.6
  Bottom Layer w0.75: v1(23.939,97.6) 24.08,97.6 24.525,97.155 U2.2 ; U16.6 111.365,21.59 111.873,22.098 v1(112.014,22.098)
pads on no net: Q2.3 Q2.5 U1.1 U1.5 U1.8 U2.1 U2.5 U2.8 U5.1 U5.5 U5.8 U6.1 U6.5 U6.8 U7.1 U7.5 U7.8 U8.1 U8.5 U8.8 U9.1 U9.5 U9.8 U10.1 U10.5 U10.8 U11.1 U11.5 U11.8 U12.1 U12.5 U12.8 U13.1 U13.5 U13.8 U14.1 U14.5 U14.8 U15.1 U15.5 U15.8 U16.1 U16.5 U16.8

## Polygon pours and split planes (outlines as drawn)
no net on Bottom Layer "NONET_L02_P001" (solid, pour order 1): 0,110.109 139.954,110.109 140.335,110.49 140.335,0.381 0.508,0.381 0.127,0 0,0.127 0,110.49

## Text inside footprints (layer, text, board x,y; h text height)
C1: Top Overlay "+" at 54.741,65.938 h1.5
C2: Top Overlay "+" at 83.972,88.261 h1.5 r270
C3: Top Overlay "+" at 68.555,74.68 h1.5 r90
C4: Top Overlay "+" at 88.24,76.077 h1.5 r90
C5: Top Overlay "+" at 99.691,69.952 h1.5 r180
C6: Top Overlay "+" at 127.737,78.236 h1.5 r90